# Altium PCB JH_2651M.PcbDoc (part 1 of 2)
Units mm, origin at the board's own origin, x right, y up, seen from the top; angles counter-clockwise.
Board outline 17.32 x 28.93 mm, 4 copper layers (TopLayer, MidLayer1, MidLayer2, BottomLayer); 57 components, 67 nets, 222 pads, 169 vias.
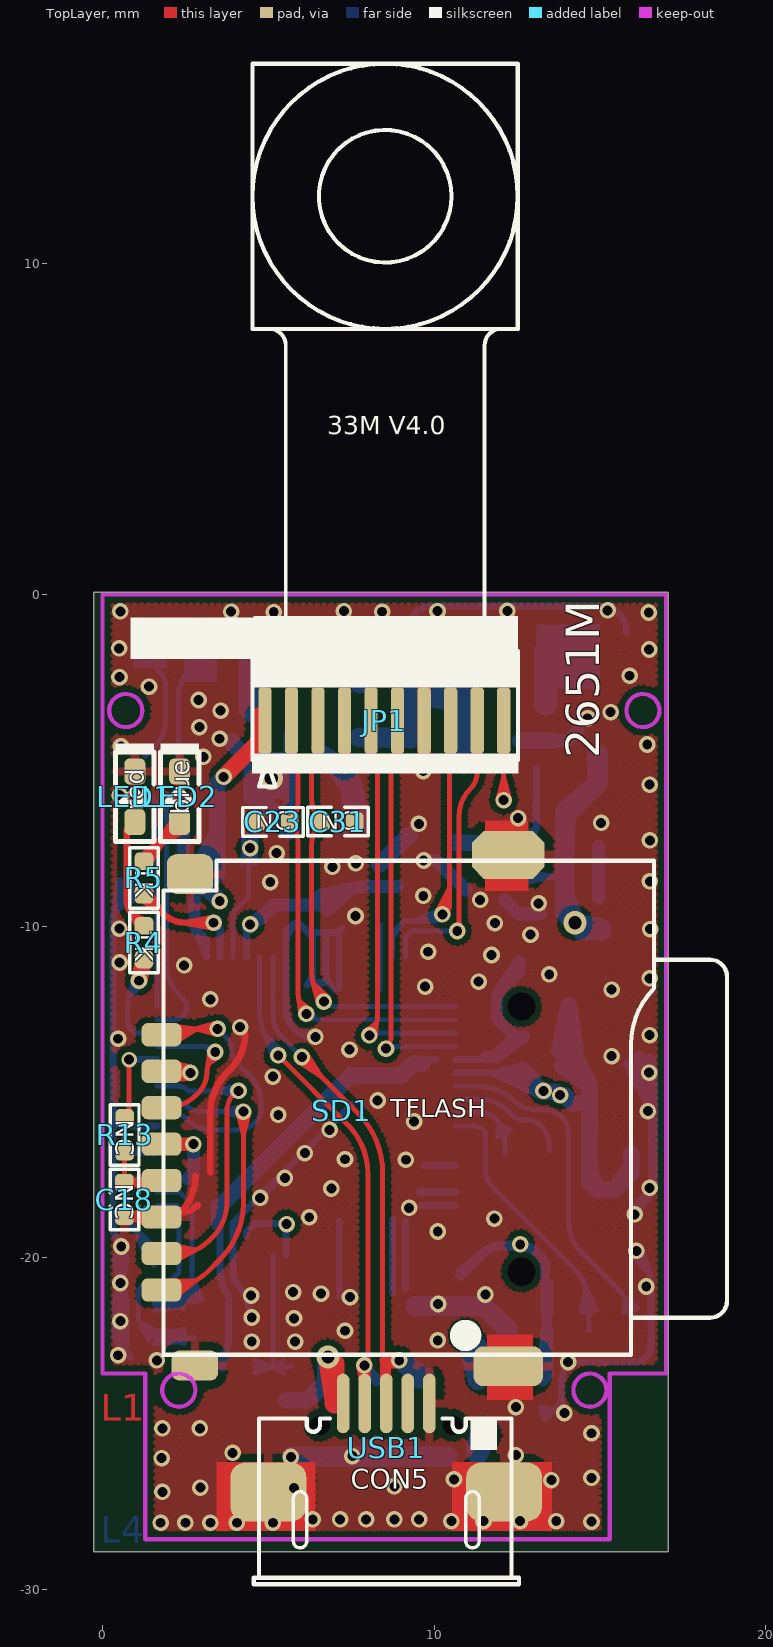
[diagram p0: TopLayer view]
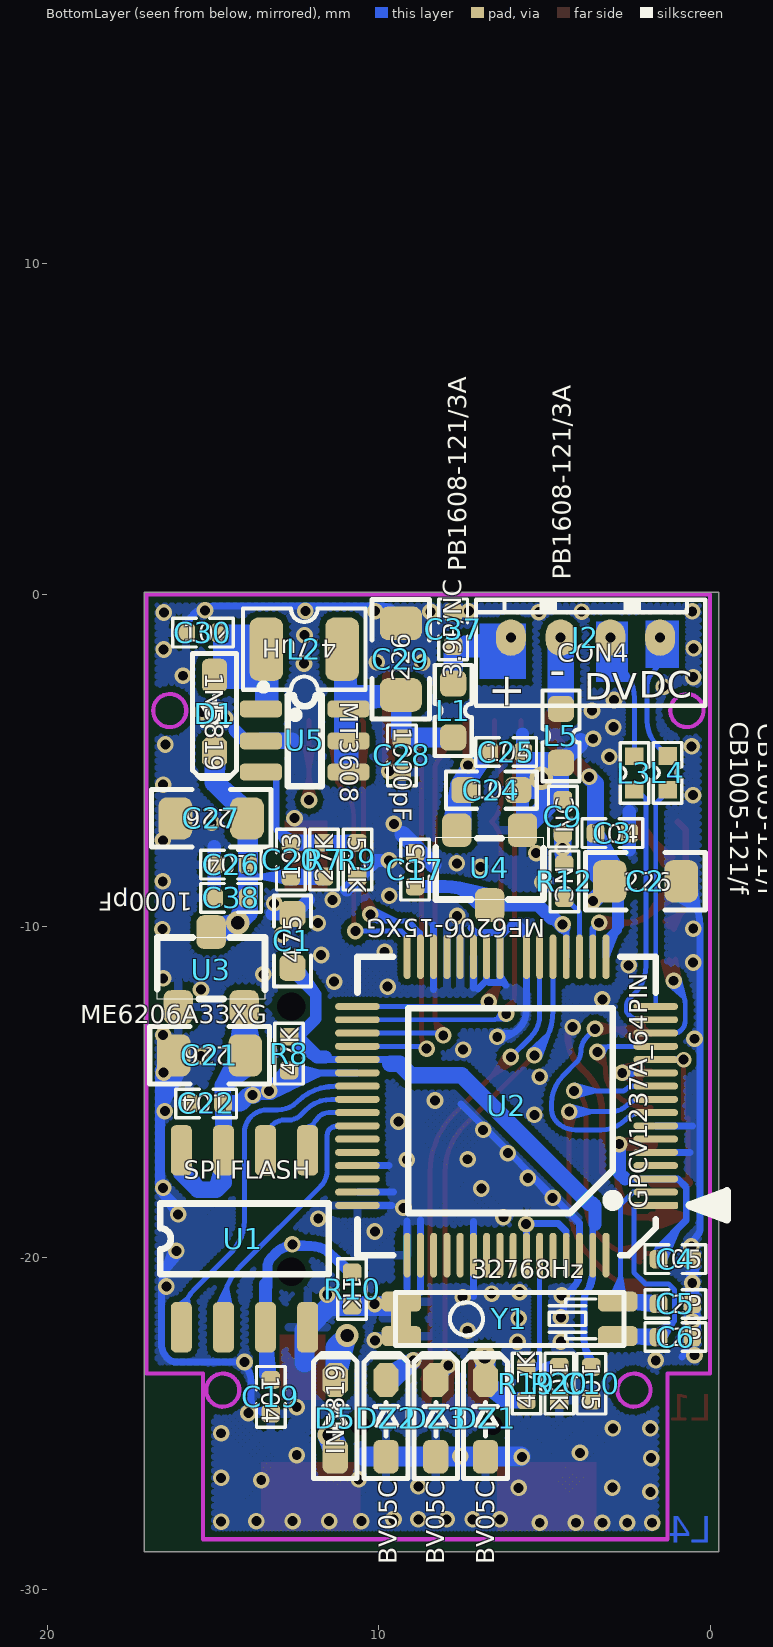
[diagram p1: BottomLayer view, seen from below]
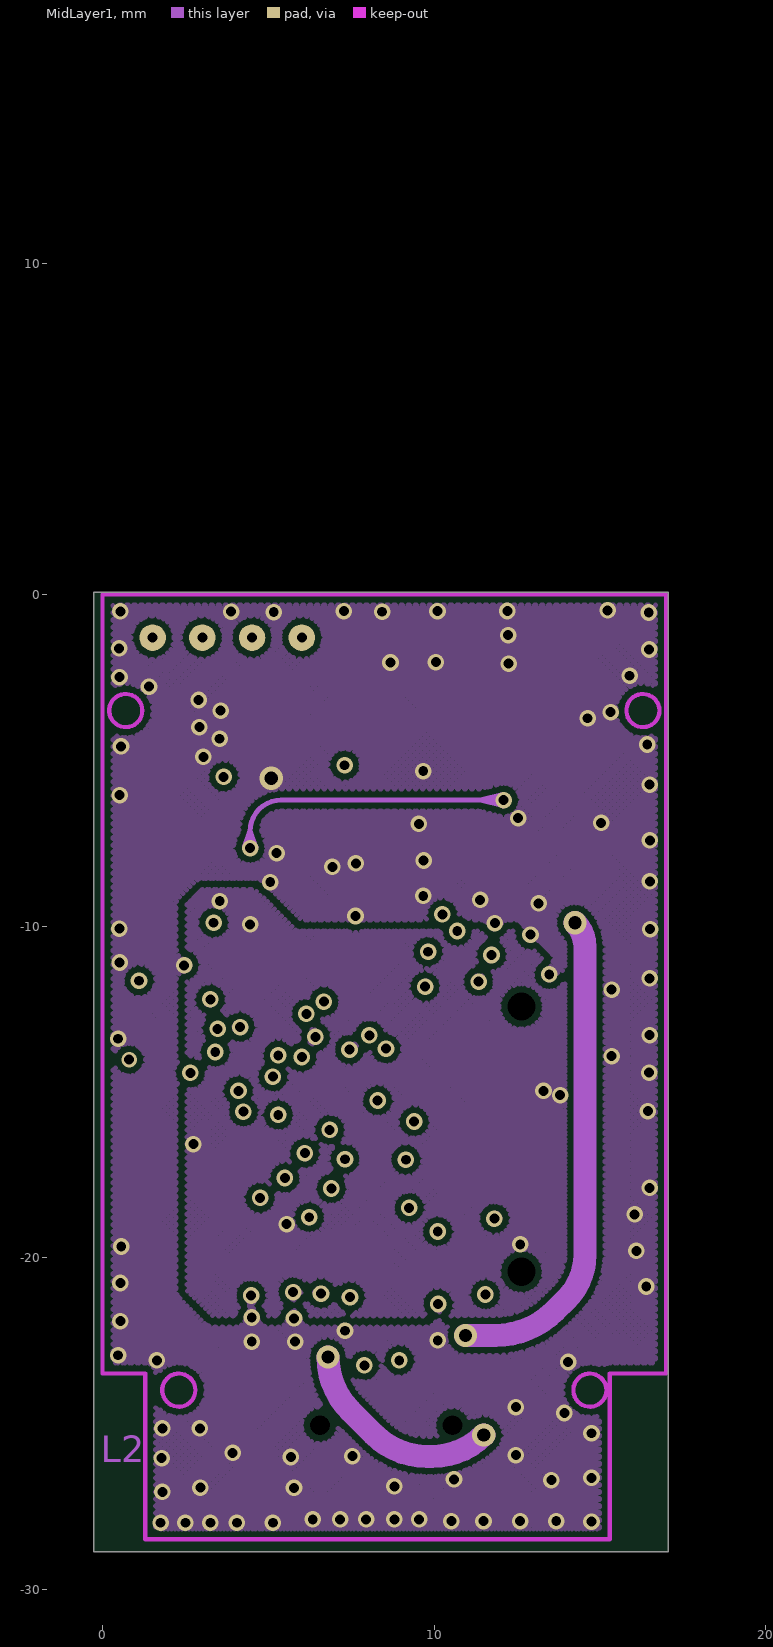
[diagram p2: MidLayer1]
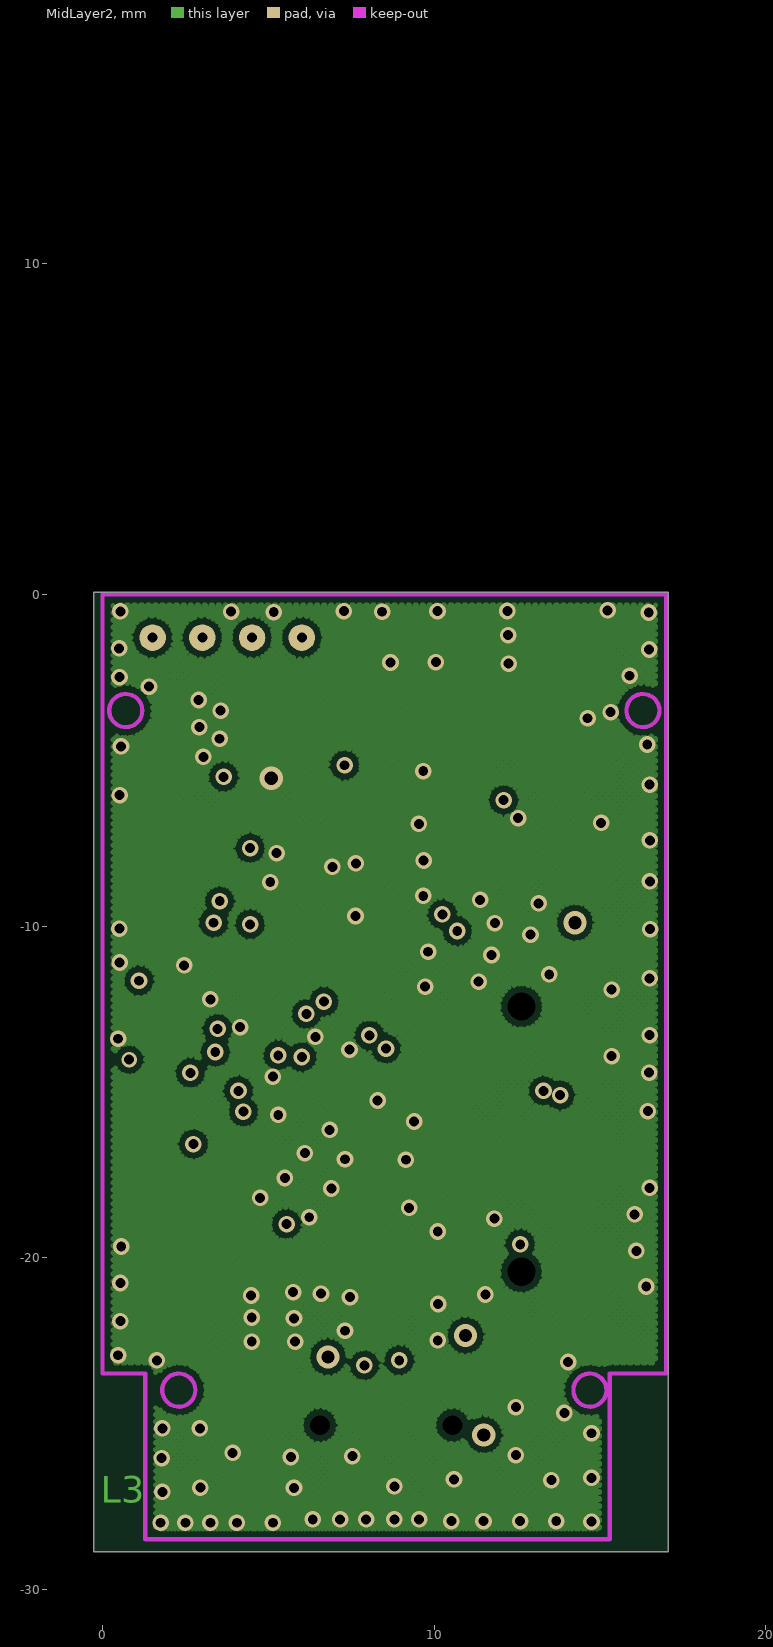
[diagram p3: MidLayer2]
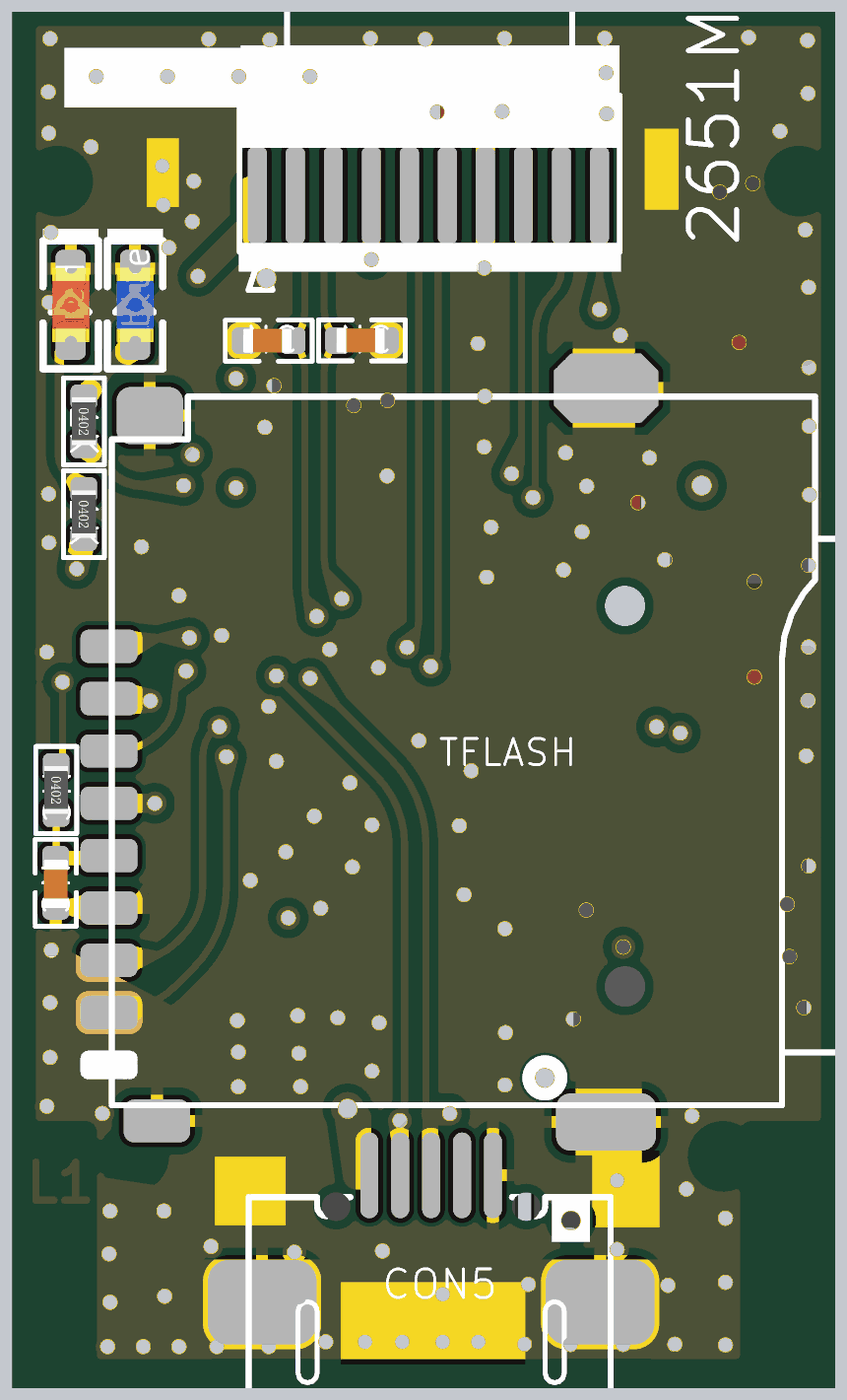
[diagram p5: 3D render of the assembled board from above, using the file's embedded part models]
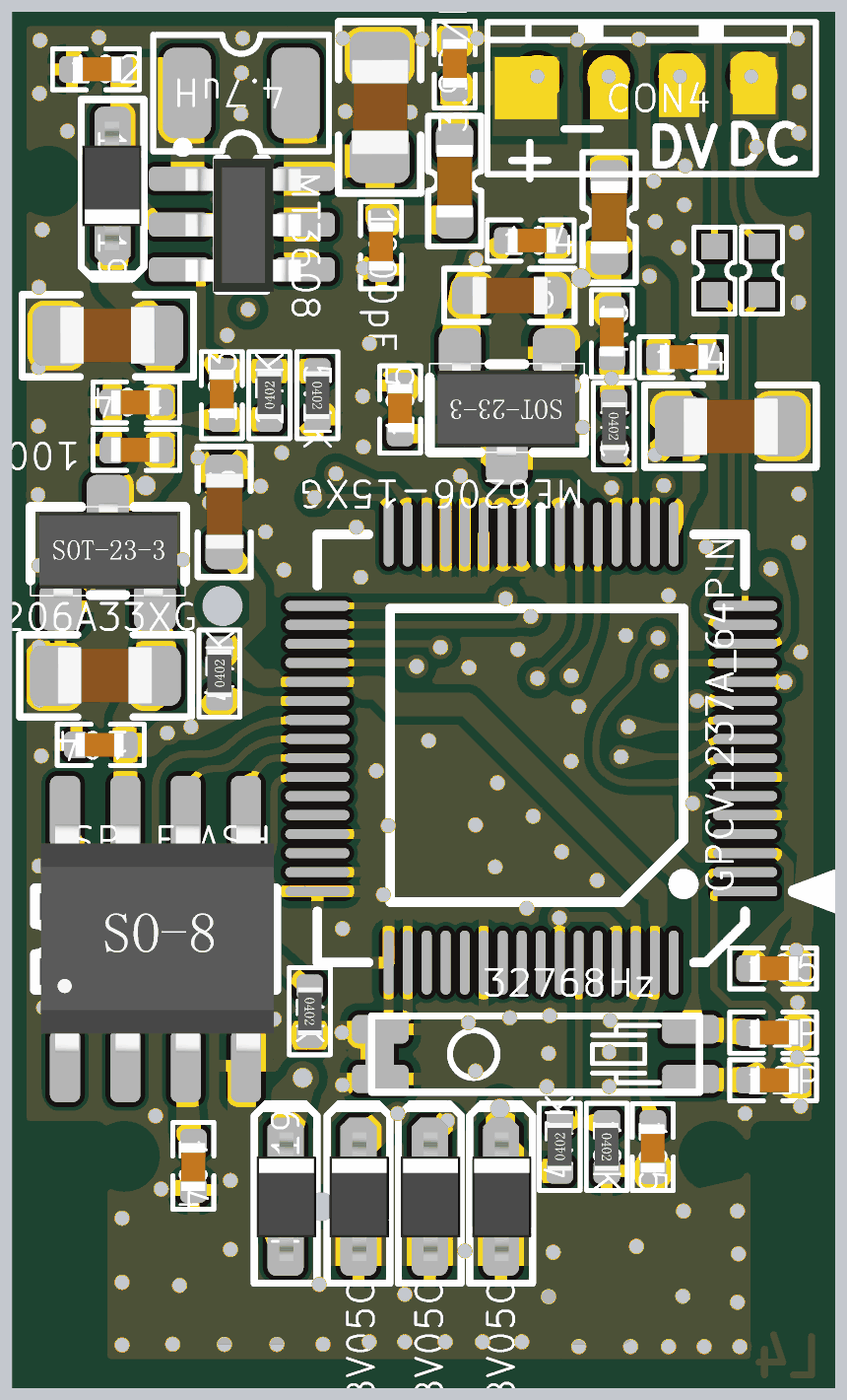
[diagram p6: 3D render of the assembled board from below, using the file's embedded part models]

## Layer stack, top to bottom
TopSolder: solder mask 0.0102, Solder Resist, Dk 3.5
TopLayer: signal copper 0.0356
Dielectric1: core 0.32, FR-4, Dk 4.8
MidLayer1: signal copper 0.0356
Dielectric2: prepreg 0.32, FR-4, Dk 4.8
MidLayer2: signal copper 0.0356
Dielectric3: core 0.32, FR-4, Dk 4.8
BottomLayer: signal copper 0.0356
BottomSolder: solder mask 0.0102, Solder Resist, Dk 3.5

## Board outline
-0.26,-28.868 17.063,-28.868 17.063,0.064 -0.26,0.064

## Design rules (kind name [scope] priority, off if disabled: settings)
Clearance Clearance_2 [InPolygon] p1: gap=0.178
Clearance [All] p2: gap=0.14
ComponentClearance [All] p1 off: gap=0.254 collisioncheckmode=3 verticalgap=0.254 showdistances=FALSE
FabricationTestPointUsage TestPointUsage [All] p1: valid=0 allowmultiple=FALSE
FabricationTestpoint Testpoint [All] p1: side=3 testpointundercomponent=TRUE minsize=1.016 maxsize=2.54 preferedsize=1.524 minholesize=0.508 maxholesize=1.016 preferedholesize=0.813 testpointgrid=0.025 allowsidetop=TRUE allowsidebottom=TRUE usegrid=TRUE gridtolerance=0
Height [All] p1 off: minheight=0 maxheight=25.4 prefheight=12.7
HoleToHoleClearance [All] p1 off: gap=0.254 allowstackedmicrovias=TRUE
MinimumSolderMaskSliver [All] p1 off: minsoldermaskwidth=0.254
NetAntennae [All] p1 off: netantennaetolerance=0
PlaneClearance [All] p1: clearance=0.203
PlaneConnect [All] p1: planeconnectstyle=Relief reliefexpansion=0.508 reliefentries=4 reliefconductorwidth=0.254 reliefairgap=0.152
PolygonConnect PolygonConnect_1 [IsVia or InComponent('C10') or InComponent('C2') or InComponent('C21') or InComponent('c27') or InComponent('C37') or InComponent('C29') or InComponent('C4') or InComponent('C5') or InComponent('C6') or InComponent('C23' ) or InComponent('C31')] p1: connectstyle=Direct reliefconductorwidth=0.254 reliefentries=4 polygonreliefangle="90 Angle" airgapwidth=0.254
PolygonConnect [All] p2: connectstyle=Relief reliefconductorwidth=0.25 reliefentries=4 polygonreliefangle="90 Angle" airgapwidth=0.254
RoomDefinition JH-2651M_V1 [InComponentClass('JH-2651M_V1')] p1 off: confinementstyle=ConfineIn formatcopy=TRUE lockcomponents=FALSE outline 15.5,-23.75 17.05,-23.75 17.05,-24.85 15.5,-24.85
RoutingLayers [All] p1: top layer_v5=TRUE mid layer 1_v5=FALSE mid layer 2_v5=FALSE bottom layer_v5=TRUE
RoutingVias [All] p1: holewidth=0.3 width=0.5 viastyle="Through Hole" minholewidth=0.3 minwidth=0.4 maxholewidth=0.3 maxwidth=0.5
SilkToSilkClearance [All] p1 off: silktosilkclearance=0.254
SilkToSolderMaskClearance SilkscreenOverComponentPads [IsPad] p1 off: minsilkscreentomaskgap=0.254 clearancetoexposedcopper=TRUE
SolderMaskExpansion [All] p1: expansion=0.102
Width Width_1 [All] p1: maxlimit=1.524 minlimit=0.14 preferedwidth=0.15
18 further rules are at their usual default settings.

## Classes and differential pairs
component class JH-2651M_V1: C1 C2 C3 C4 C5 C6 C9 C10 C17 C18 C19 C20 C21 C22 C24 C25 C26 C27 C28 C29 C30 C37 C38 D1 D5 DZ1 DZ2 DZ3 J2 JP1 L1 L2 LED1 LED2 R4 R5 R7 R8 R9 R10 R12 R19 R20 SD1 U1 U2 U3 U4 U5 USB1 Y1

## Components (designator, comment, footprint, x,y, rotation, side; value= is the part's Value field where it differs from the comment)
C1 "475" C0603 12.6,-10.45 r90 bottom
C2 "226" C0805 1.95,-8.65 r180 bottom
C3 "104" C0402 2.95,-7.2 r180 bottom
C4 "105" C0402 1.05,-20.05 r180 bottom
C5 "12P" C0402 1.05,-21.4 r180 bottom
C6 "12P" C0402 1.05,-22.4 r180 bottom
C9 "NC" C0402 4.442,-6.7 r90 bottom
C10 "105" C0402 3.583,-23.807 r270 bottom
C17 "105" C0402 8.9,-8.3 r90 bottom
C18 "NC" C0402 0.659,-18.25 r270 top
C19 "104" C0402 13.25,-24.2 r270 bottom
C20 "103" C0402 12.65,-8 r90 bottom
C21 "226" C0805 15.1,-13.9 r0 bottom
C22 "104" C0402 15.2,-15.35 r0 bottom
C23 "NC" C0402 5.14,-6.854 r180 top (schematic designator C18)
C24 "106" C0603 6.6,-5.9 r180 bottom
C25 "104" C0402 6.15,-4.75 r180 bottom
C26 "104" C0402 14.45,-8.15 r0 bottom
C27 "226" C0805 15.05,-6.75 r0 bottom
C28 "1000pF" C0402 9.3,-4.85 r270 bottom
C29 "226" C0805 9.33,-1.95 r90 bottom
C30 "102" C0402 15.3,-1.15 r180 bottom
C31 "NC" C0402 7.1,-6.85 r180 top (schematic designator C18)
C37 "3.9P/NC" C0402 7.75,-1.05 r90 bottom
C38 "1000pF" C0402 14.45,-9.15 r0 bottom
D1 "1N5819" SOD-323 14.95,-3.6 r270 bottom
D5 "IN5819" SOD-323 11.308,-24.85 r90 bottom
DZ1 "BV05C" ESD-SOD323 6.8,-24.65 r90 bottom
DZ2 "BV05C" ESD-SOD323 9.8,-24.65 r90 bottom
DZ3 "BV05C" ESD-SOD323 8.3,-24.65 r90 bottom
J2 "CON4" SIP4/1.27 1.7,-1.3 r0 bottom
JP1 "33M V4.0" 10pin-mipi/0.7 8.5,-3.8 r0 top
L1 "PB1608-121/3A" L0603 7.75,-3.5 r270 bottom
L2 "4.7uH" L2520 11.1,-1.65 r0 bottom
L3 "CB1005-121/f" L0402 2.284,-5.383 r270 bottom (schematic designator L1)
L4 "CB1005-121/f" L0402 1.285,-5.377 r270 bottom (schematic designator L1)
L5 "PB1608-121/3A" L0603 4.5,-4.263 r270 bottom (schematic designator L1)
LED1 "red" LED0603R 0.973,-6.1 r90 top
LED2 "blue" LED0603B 2.327,-6.1 r90 top
R4 "1K" R0402 1.25,-10.5 r270 top
R5 "1K" R0402 1.25,-8.55 r270 top
R7 "27K" R0402 11.65,-8 r90 bottom
R8 "47K" R0402 12.7,-13.85 r90 bottom
R9 "5.1K" R0402 10.64,-8 r270 bottom
R10 "1K" R0402 10.8,-20.95 r270 bottom
R12 "NC" R0402 4.4,-8.65 r270 bottom
R13 "NC" R0402 0.669,-16.3 r270 top (schematic designator R12)
R19 "4.7K" R0402 5.54,-23.8 r90 bottom
R20 "10K" R0402 4.55,-23.8 r270 bottom
SD1 "TFLASH" TFC-0002 12.637,-20.429 r90 top
U1 "SPI FLASH" SOP8 15.95,-22.1 r90 bottom
U2 "GPCV1237A_64PIN" LQFP64-0.4 1.64,-18.427 r0 bottom
U3 "ME6206A33XG" SOT23 15.05,-11.3 r180 bottom
U4 "ME6206-15XG" SOT23 6.65,-8.25 r0 bottom
U5 "MT3608" SOT23-6 13.55,-3.45 r180 bottom
USB1 "CON5" USB/MIN5PIN-SMT 7.258,-24.4 r180 top
Y1 "32768Hz" XTAL-1.5X7 6.05,-21.85 r0 bottom

## Footprints (in the part's own frame and the unit in brackets; to place one, negate y for a bottom-side part, rotate by r counter-clockwise, add the part's x,y. Pads: shape width x height; smd on the part's side, far side on the other; paste and mask are expansions set on the pad)
10pin-mipi/0.7 [mm]
  rrect50% 0.4x2 smd: 1(-3.6,0) 2(-2.8,0) 3(-2,0) 4(-1.2,0) 5(-0.4,0) 6(0.4,0) 7(1.2,0) 8(2,0) 9(2.8,0) 10(3.6,0)
  silkscreen extent -3.97,-1.99 4.03,19.81
C0402 [mil] "0402"
  rrect50% 21x22 smd: 1(-20,0) 2(20,0)
  silkscreen extent -36,-17 36,17, body extent -19,-10 21,10, height 10
C0603 [mil] "0603"
  rrect50% 31x31 smd: 1(-32,0) 2(32,0)
  silkscreen extent -54,-22 54,22, body extent -31,-16 32,15, height 24
C0805 [mil] "0805"
  rrect50% 40x50 smd: 1(-42.5,0) 2(42.5,0)
  silkscreen extent -71,-34 71,34, body extent -39,-24 40,23, height 47
ESD-SOD323 [mil] "ESD管"
  oct 40x30 smd: 1(37.63,-0.98)
  rrect50% 40x30 smd: 2(-53.37,-0.98)
  silkscreen extent -79,-27 69,25, body extent -61,-26 45,23, height 32
L0402 [mil] "0402"
  rect 21x22 smd: 1(-20,0) 2(20,0)
  silkscreen extent -36,-17 36,17
L0603 [mil] "600 0HM/600MA"
  rrect50% 31x31 smd: 1(-32,0) 2(32,0)
  silkscreen extent -54,-22 54,22, body extent -30,-15 30,15, height 30
L2520 [mil]
  rrect50% 40x75 smd: 1(0,0) 2(90,0)
  silkscreen extent -28,-48 118,48
LED0603B [mil] "06"
  rrect50% 31x25 smd: 1(-30,0) 2(30,0)
  silkscreen extent -53,-23 63,23, body extent -31,-16 31,15, height 20
LED0603R [mil] "06"
  rrect50% 31x25 smd: 1(-30,0) 2(30,0)
  silkscreen extent -53,-23 63,23, body extent -31,-16 31,15, height 20
LQFP64-0.4 [mm] "IC"
  rrect50% 1.35x0.21 smd: 1(0,0)
  oval 1.35x0.21 smd: 2(0,-0.4) 3(0,-0.8) 4(0,-1.2) 5(0,-1.6) 6(0,-2) 7(0,-2.4) 8(0,-2.8) 9(0,-3.2) 10(0,-3.6) 11(0,-4) 12(0,-4.4) 13(0,-4.8) 14(0,-5.2) 15(0,-5.6) 16(0,-6) 33(9,-6) 34(9,-5.6) 35(9,-5.2) 36(9,-4.8) 37(9,-4.4) 38(9,-4) 39(9,-3.6) 40(9,-3.2) 41(9,-2.8) 42(9,-2.4) 43(9,-2) 44(9,-1.6) 45(9,-1.2) 46(9,-0.8) 47(9,-0.4) 48(9,0)
  oval 0.21x1.35 smd: 17(1.5,-7.5) 18(1.9,-7.5) 19(2.3,-7.5) 20(2.7,-7.5) 21(3.1,-7.5) 22(3.5,-7.5) 23(3.9,-7.5) 25(4.7,-7.5) 26(5.1,-7.5) 27(5.5,-7.5) 28(5.9,-7.5) 29(6.3,-7.5) 30(6.7,-7.5) 31(7.1,-7.5) 32(7.5,-7.5) 49(7.5,1.5) 50(7.1,1.5) 51(6.7,1.5) 52(6.3,1.5) 53(5.9,1.5) 54(5.5,1.5) 55(5.1,1.5) 56(4.7,1.5) 57(4.3,1.5) 58(3.9,1.5) 59(3.5,1.5) 60(3.1,1.5) 61(2.7,1.5) 62(2.3,1.5) 63(1.9,1.5) 64(1.5,1.5)
  oval 0.21x1.35 on Bottom Overlay: 24(4.3,-7.5)
  silkscreen extent -2.15,-7.5 9,1.5
R0402 [mil] "0402"
  rrect50% 21x22 smd: 1(-20,0) 2(20,0)
  silkscreen extent -36,-17 36,17, body extent -20,-10 20,10, height 14
SIP4/1.27 [mm] "连?"
  oval 0.9x1.1 / inner round 0.8 / far side round 0.8 hole 0.3: 1(4.31,0) 2(2.81,0) 3(1.31,0) 4(-0.19,0)
  silkscreen extent -1.55,-1.14 5.36,2.06
SOD-323 [mil] "贴?"
  rrect50% 40x30 smd: 1(-45.5,0)
  oct 40x30 smd: 2(45.5,0)
  silkscreen extent -72,-26 77,26, body extent -53,-25 53,24, height 32
SOP8 [mil] "IC"
  rrect50% 60x25 smd: 1(0,0) 2(0,-50) 3(0,-100) 4(0,-150) 5(210,-150) 6(210,-100) 7(210,-50) 8(210,0)
  round 30 on Bottom Overlay: ""(82,3)
  silkscreen extent 63,-175 147,25, body extent -13,-173 224,20
SOT23 [mil] "SOT23"
  rrect50% 35x40 smd: 1(-39,-45) 2(39,-45) 3(0,44)
  silkscreen extent -64,-36 64,38, body extent -57,-54 57,57
SOT23-6 [mil] "SOT23-6"
  rrect50% 50x20 smd: 1(0,0) 2(0,-38) 3(0,-75) 4(104,-75) 5(104,-38) 6(104,0)
  silkscreen extent 0,-92 72,29, body extent 5,-93 101,17, height 43
TFC-0002 [mm]
  round 0.8 hole 0.85 unplated: 0(0,0) 0(8,0)
  rrect50% 0.7x1.2 smd: 1(7.15,10.858) 2(6.05,10.858) 3(4.95,10.858) 4(3.85,10.858) 5(2.75,10.858) 6(1.65,10.858) 7(0.55,10.858) 8(-0.55,10.858)
  rrect50% 0.6x1.2 on Top Overlay: 9(-1.65,10.858)
  rrect50% 1.2x2.1 smd: 10(-2.85,0.399)
  rrect50% 0.9x1.4 smd: 10(-2.827,9.851)
  rrect50% 1.2x1.4 smd: 10(12,10)
  oct 1.454x2.2 smd: 10(12.577,0.399)
  silkscreen extent -2.5,-6.2 12.4,10.8
USB/MIN5PIN-SMT [mm] "迈克"
  oval 0.381x1.8 smd: 1(0,0) 2(-0.65,0) 3(-1.3,0) 4(-1.95,0) 5(-2.6,0)
  rrect50% 2.286x1.778 smd: 5(-4.856,2.667) 5(2.256,2.667)
  round 0.5 hole 0.6 unplated: ""(-3.3,0.658) ""(0.7,0.658)
  silkscreen extent -5.3,0.46 2.7,5.46
XTAL-1.5X7 [mm]
  rrect50% 1.2x0.6 smd: 1(-3.264,-0.521) 2(-3.264,0.521) 3(3.264,-0.521) 4(3.264,0.521)
  rect 0.6x1 smd: 3(3.28,-0.015)
  silkscreen extent -3.45,-0.8 3.45,0.8

## Part data
C1 C2 C3 C4 C5 C6 C9 C10 C17 C18 C19 C20 C23 C26 C27 C28 C29 C30 C31 C37: library part CAP, "Capacitor"
C21 C22 C24 C25 C38: library part CAP, "贴?"
D1 D5: library part "DIODE SCHOTTKY", "Diode(Schottky)"
DZ1 DZ2 DZ3: library part ESD, "ESD"
J2 USB1: "Connector"
JP1: library part CON10, "Connector"
L1 L3 L4 L5: library part L-1, "电感"
L2: library part L-1, "电?"
LED1: library part LED-R, "LED/红色"
LED2: library part LED-B, "LED/蓝色"
R4 R5 R7 R8 R9 R10 R12 R13 R19 R20: library part RES, "Resistor"
SD1: library part SD-MICRO, "外卡"
U1: library part AT25010A
U2: library part GPCV12417A_64PIN
U3 U4: library part IC3, "IC(Cmanostat)"
U5: library part Component_1
Y1: library part CRYSTAL, "Crystal"

## Via types
v1: diameter 0.5, hole 0.3, TopLayer to BottomLayer, tented both sides, 163 vias
v2: diameter 0.7, hole 0.4, TopLayer to BottomLayer, tented both sides, 5 vias
v3: diameter 0.47, hole 0.3, TopLayer to BottomLayer, tented both sides, 1 vias

## Nets (pads, with @x,y where several pads share a name; then routed paths per layer and width w, separated by ;. In a path a pad name is that pad's centre, name@x,y a point inside that pad or via, vN(x,y) a via of type N, cw(c..) or ccw(c..) an arc to the next point about the centre after c; other vN are vias at no path point)
3.8V: C20.1 C26.1 C27.1 C38.1 D1.2 D5.2 R7.1 U3.3 | length 62.6
  MidLayer1 w0.7: v2(10.95,-22.35) 11.848,-22.35 ccw(c11.848,-19.81) 13.644,-21.606 14,-21.25 ccw(c12.672,-19.922) 14.55,-19.922 14.55,-10.624 ccw(c13.526,-10.624) v2(14.25,-9.9)
  BottomLayer w0.2: R7.1@11.65,-8.508 C20.1@12.65,-8.508 13.8,-8.508 ; R7.1@11.663,-8.508 C20.1@12.529,-8.508 ; R7.1@11.679,-8.674 C20.1@12.529,-8.508 ; R7.1@11.679,-8.342 C20.1@12.529,-8.508 ; C20.1@12.594,-8.669 R7.1@11.778,-8.361 ; C20.1@12.594,-8.347 R7.1@11.778,-8.655 ; C20.1@12.649,-8.674 R7.1@11.778,-8.655 ; C20.1@12.649,-8.342 R7.1@11.778,-8.361 ; C20.1@12.663,-8.508 13.529,-8.508 ; C20.1@12.679,-8.674 13.529,-8.508 ; C20.1@12.679,-8.342 13.529,-8.508 ; R7.1@11.771,-8.508 12.621,-8.674 R7.1@11.771,-8.508 ; R7.1@11.771,-8.508 12.621,-8.342 R7.1@11.771,-8.508 ; R7.1@11.771,-8.508 C20.1@12.637,-8.508 ; R7.1@11.771,-8.508 C20.1@12.637,-8.508 ; R7.1@11.778,-8.655 C20.1@12.637,-8.508 ; R7.1@11.778,-8.361 C20.1@12.637,-8.508
  BottomLayer w0.6: C27.1@13.971,-6.523 14.95,-5.67 ; D1.2@14.9,-4.883 14.95,-5.67 ; D1.2@14.95,-4.806 14.95,-5.67 ; U3.3@15.05,-10.069 v2(14.25,-9.9) ; v2(10.95,-22.35) 11.308,-22.708 ; v2(10.95,-22.35) 11.308,-22.708 ; v2(10.95,-22.35) 11.308,-23.567 11.308,-22.708 ; v2(10.95,-22.35) 11.308,-22.708 ; v2(10.95,-22.35) D5.2@11.308,-23.694 11.308,-22.708 ; 13.942,-9.592 v2(14.25,-9.9) ; 13.942,-9.592 C38.1@13.942,-9.113 ; 13.942,-9.592 C38.1@13.942,-9.113 ; 13.942,-9.592 C38.1@13.942,-9.15 C38.1@13.942,-9.1 ; C38.1@13.942,-9.113 v2(14.25,-9.9) ; C38.1@13.942,-9.113 v2(14.25,-9.9) ; C38.1@13.942,-9.113 v2(14.25,-9.9) ; C38.1@13.942,-9.113 v2(14.25,-9.9) ; C38.1@13.942,-9.1 13.942,-8.113 13.942,-9.087 C26.1@13.942,-8.1 ; C38.1@13.942,-9.1 v2(14.25,-9.9) ; C38.1@13.942,-9.1 C26.1@13.942,-8.15 C26.1@13.942,-8.1 ; C26.1@13.942,-8.1 13.971,-6.777 13.942,-8.087 C27.1@13.942,-6.679 ; C26.1@13.942,-8.1 C27.1@13.942,-6.679 ; C27.1@13.942,-6.679 14.95,-5.67 ; v2(14.25,-9.9) v2@14.482,-10.132 ; v2(14.25,-9.9) U3.3@15.05,-10.132 ; v2(14.25,-9.9) U3.3@15.05,-10.132 ; v2@14.482,-10.132 U3.3@15.05,-10.132 ; v2@14.482,-10.132 U3.3@15.05,-10.132
AGND: 
CSI_MCLK: 
CSI_SCK: JP1.8 U2.31 | length 16.1
  TopLayer w0.15: v1@10.087,-9.586 10.46,-8.879 ; JP1.8@10.375,-4.604 10.46,-5.251 ; v1@10.423,-9.677 10.46,-8.879 ; JP1.8@10.5,-4.6 10.46,-5.251 ; JP1.8@10.5,-3.8 10.46,-3.84 10.46,-9.44 v1(10.25,-9.65) 10.46,-8.879 ; JP1.8@10.623,-4.62 10.46,-5.251
  BottomLayer w0.15: U2.31@8.74,-10.927 8.74,-10.2 ; 9.027,-9.913 U2.31@8.74,-10.357 ; v1@10.191,-9.485 9.435,-9.85 ; v1@10.274,-9.823 9.435,-9.85 ; U2.31@8.74,-10.357 8.74,-10.2 ; U2.31@8.74,-10.357 8.74,-10.2 ; 8.74,-10.2 9.09,-9.85 10.05,-9.85 v1(10.25,-9.65) 9.435,-9.85
CSI_SDA: JP1.9 U2.32 | length 10
  TopLayer w0.15: v1(10.7,-10.15) 10.75,-10.1 10.75,-6.695 cw(c11.945,-6.695) 11.1,-5.85 ccw(c10.617,-5.367) 11.3,-5.367 JP1.9@11.3,-4.75 ; JP1.9@11.176,-4.612 11.3,-5.25 ; JP1.9@11.3,-4.6 11.3,-5.25 ; JP1.9@11.424,-4.612 11.3,-5.25
  BottomLayer w0.15: U2.32@9.14,-10.927 9.14,-10.322 9.312,-10.15 ; U2.32@9.14,-10.357 9.312,-10.15 ; v1(10.7,-10.15) 9.312,-10.15
D+: DZ2.1 U2.22 USB1.3 | length 24.3
  TopLayer w0.15: v1@5.9,-14.086 6.578,-14.518 v1@6.146,-13.84 ; v1(6.01,-13.95) 7.706,-15.646 cw(c5.91,-17.442) 8.45,-17.442 8.45,-24.14 ccw(c8.818,-24.14) USB1.3@8.558,-24.4 ; USB1.3@8.443,-23.699 8.45,-23.043 ; USB1.3@8.558,-23.691 8.45,-23.043 ; USB1.3@8.67,-23.662 8.45,-23.043
  TopLayer w0.3: USB1.3@8.558,-24.4 8.558,-23.058 ; USB1.3@8.558,-23.691 8.558,-23.058 ; 8.558,-23.058 v1(8.95,-23.1) 8.558,-23.058
  TopLayer w0.5: 8.6,-23.1 v1(8.95,-23.1) 8.6,-23.1
  BottomLayer w0.15: 5.14,-12.052 U2.22@5.14,-11.497 ; U2.22@5.14,-10.927 5.14,-12.684 ccw(c6.096,-12.684) 5.42,-13.36 v1(6.01,-13.95)
  BottomLayer w0.5: DZ2.1@9.775,-23.694 9.544,-23.694 v1(8.95,-23.1) DZ2.1@9.775,-23.567
D-: DZ3.1 U2.21 USB1.2 | length 19.6
  TopLayer w0.15: v1(5.3,-13.9) 7.4,-16 cw(c5.951,-17.449) 8,-17.449 8,-24.177 cw(c7.685,-24.177) USB1.2@7.908,-24.4 ; v1@7.725,-23.243 USB1.2@7.795,-23.664
  TopLayer w0.35: USB1.2@7.908,-24.4 v1@7.908,-23.258
  BottomLayer w0.15: 4.74,-12.052 U2.21@4.74,-11.497 ; U2.21@4.74,-10.927 4.74,-12.548 ccw(c6.652,-12.548) v1(5.3,-13.9) 4.889,-13.274 ; v1@5.143,-13.978 4.889,-13.274 ; v1@5.434,-13.788 4.889,-13.274
  BottomLayer w0.35: v1(7.9,-23.25) 7.9,-23.319 DZ3.1@8.275,-23.694
DC: J2.4 L4.1 | length 3.9
  BottomLayer w0.15: L4.1@1.285,-4.869 1.585,-4.568 ccw(c0.826,-3.809) 1.9,-3.809 1.9,-2.74 ccw(c1.388,-2.74) 1.75,-2.378 cw(c2.329,-1.798) 1.51,-1.798 J2.4@1.51,-1.3
DV: J2.3 L3.1 | length 3.8
  BottomLayer w0.15: L3.1@2.284,-4.875 2.284,-3.129 cw(c3.533,-3.129) 2.65,-2.245 ccw(c1.781,-1.376) 3.01,-1.376 J2.3@3.01,-1.3
GND: C1.2 C2.2 C3.2 C4.2 C5.2 C6.2 C9.2 C10.2 C17.2 C18.2 C19.2 C21.2 C22.2 C23.2 C24.2 C25.2 C26.2 C27.2 C28.2 C29.2 C30.1 C31.1 C37.2 C38.2 DZ1.2 DZ2.2 DZ3.2 JP1.7 L5.2 LED1.2 LED2.2 R9.2 R10.2 R20.2 SD1.6 SD1.10 U1.4 U2.5 U2.7 U2.23 U2.25 U2.26 U2.27 U2.28 U2.29 U2.30 U2.45 U2.47 U2.48 U2.49 U2.50 U2.54 U2.62 U3.1 U4.1 U5.2 USB1.5 Y1.3 Y1.4 | length 153.8
  TopLayer w0.2: SD1.6@1.779,-18.779 SD1.6@2.233,-18.779 ; SD1.6@2.311,-18.65 ccw(c2.311,-17.868) SD1.6@2.34,-18.649 ; 2.803,-17.531 cw(c1.22,-17.531) SD1.6@2.34,-18.649 ; 2.865,-18.421 cw(c2.311,-17.868) SD1.6@2.34,-18.649 ; 3.25,-17.431 3.25,-15.635 cw(c4.957,-15.635) 3.75,-14.427 3.864,-14.314 ccw(c2.81,-13.26) 4.3,-13.26 4.137,-13.097 4.137,-13.063 v1(4.15,-13.05)
  TopLayer w0.3: C18.2@0.9,-18.758 1.758,-18.758 C18.2@0.913,-18.758 ; C18.2@0.9,-18.758 1.491,-18.975 C18.2@0.913,-18.758 ; C18.2@0.9,-18.758 1.504,-18.581 C18.2@0.913,-18.758 ; C18.2@0.9,-18.758 1.529,-18.779 C18.2@0.913,-18.758
  TopLayer w0.4: v1@9.7,-5.134 JP1.7@9.7,-3.8 9.7,-2.478
  BottomLayer w0.21: C6.2@0.381,-22.399 C5.2@0.394,-21.497 ; C5.2@0.381,-21.428 C6.2@0.542,-22.256 ; C5.2@0.381,-21.373 0.542,-20.491 ; C4.2@0.381,-20.077 v1@0.542,-20.959 ; C6.2@0.385,-22.347 C5.2@0.69,-21.497 ; C4.2@0.385,-19.999 v1@0.542,-19.693 ; C6.2@0.406,-22.5 0.683,-22.782 ; C2.2@0.494,-8.633 0.374,-9.511 ; 0.526,-16.027 U2.7@1.64,-16.027 ; C6.2@0.542,-22.413 0.683,-22.782 ; C5.2@0.542,-21.413 C6.2@0.542,-22.256 ; C5.2@0.542,-21.387 0.542,-20.491 ; C4.2@0.542,-20.063 v1@0.542,-20.959 ; C4.2@0.542,-20.037 v1@0.542,-19.693 ; 0.6,-16.827 U2.5@1.64,-16.827 ; C6.2@0.699,-22.347 C5.2@0.394,-21.497 ; C4.2@0.699,-19.999 v1@0.542,-19.693 ; C2.2@0.7,-8.687 0.374,-9.511 ; C6.2@0.702,-22.387 0.683,-22.782 ; C5.2@0.703,-21.428 C6.2@0.542,-22.256 ; C5.2@0.703,-21.373 0.542,-20.491 ; C4.2@0.703,-20.077 v1@0.542,-20.959 ; C6.2@0.703,-22.399 C5.2@0.69,-21.497 ; 0.85,-23 cw(c1.594,-22.256) C6.2@0.542,-22.256 ; C2.2@0.871,-8.777 0.374,-9.511 ; C2.2@0.871,-8.65 ccw(c2.228,-10.008) 0.308,-10.008 0.308,-19.128 ccw(c0.622,-19.128) 0.4,-19.35 cw(c0.057,-19.693) v1@0.542,-19.693 ; C2.2@1.018,-8.902 0.374,-9.511 ; C2.2@1.144,-9.073 0.374,-9.511 ; U2.62@3.94,-20.497 4.013,-20.75 ; U2.62@3.94,-19.357 3.94,-18.952 ; v1@4.431,-21.8 4.431,-21.664 ccw(c3.3,-21.664) 4.1,-20.863 cw(c4.486,-20.477) 3.94,-20.477 U2.62@3.94,-19.927 3.94,-18.952 ; v1@5.491,-17.401 v1@4.85,-18.15 ; 5.54,-12.232 U2.23@5.54,-11.497 ; 5.955,-9.945 6.204,-10.194 ; v1@6.399,-13.486 5.959,-13.241 ; v1@6.403,-13.36 cw(c6.403,-12.472) 5.775,-13.1 cw(c6.342,-12.533) 5.54,-12.533 U2.23@5.54,-10.927 5.54,-10.16 ; v1@6.45,-13.35 5.959,-13.241 ; v1@6.461,-13.205 5.959,-13.241 ; 7,-11.9 6.74,-11.64 ; 7.14,-21.171 U2.54@7.14,-19.927 7.14,-18.917 ; U2.27@7.14,-11.497 7.14,-11.874 U2.27@7.14,-10.927 7.14,-10.15 U2.27@7.14,-10.357 ; 7.218,-10.06 7.084,-10.194 6.634,-10.194 ; 7.521,-15.371 3.94,-18.952 ; 8.34,-11.919 U2.30@8.34,-10.927 8.34,-9.973 ; U2.50@8.74,-20.497 8.74,-21.05 U2.50@8.74,-19.927 8.74,-18.86 U2.50@8.74,-19.357 ; U2.49@9.14,-20.497 9.14,-20.94 U2.49@9.14,-19.927 9.14,-18.9 U2.49@9.14,-19.357 ; C29.2@9.33,-0.871 cw(c9.851,-0.871) 9.851,-0.35 15.008,-0.35 cw(c15.008,-1.15) C30.1@15.808,-1.15 ; U2.48@10.07,-18.427 9.6,-18.427 U2.48@10.64,-18.427 ; U2.47@10.07,-18.027 9.55,-18.027 U2.47@10.64,-18.027 ; U2.45@10.07,-17.227 9.69,-17.227 U2.45@10.64,-17.227 ; C19.2@13.25,-24.708 ccw(c13.25,-24.003) 13.748,-24.502 ccw(c13.503,-24.256) 13.85,-24.256 13.85,-23.712 cw(c14.432,-23.712) 14.02,-23.3 cw(c14.383,-23.662) 14.383,-23.15 16.113,-23.15 ccw(c16.113,-22.815) 16.35,-23.052 16.372,-23.03 ccw(c15.942,-22.6) 16.55,-22.6 16.55,-20.886 ccw(c15.014,-20.886) v1(16.1,-19.8) ; C19.2@13.256,-24.546 13.602,-24.614 ; C19.2@13.263,-24.708 13.602,-24.614 ; C19.2@13.341,-24.85 13.602,-24.614 ; v1@15.982,-19.884 16.498,-20.489 v1@16.232,-19.739 ; C5.2@0.394,-21.497 C6.2@0.542,-22.387 ; C6.2@0.542,-22.387 C5.2@0.542,-21.491 ; C6.2@0.542,-22.387 C5.2@0.69,-21.497 ; C6.2@0.542,-22.387 C5.2@0.542,-21.491 ; C6.2@0.542,-22.256 C5.2@0.542,-21.4 C4.2@0.542,-20.05 v1@0.542,-19.693 ; C5.2@0.542,-21.491 0.381,-22.373 C5.2@0.542,-21.491 ; C5.2@0.542,-21.491 0.703,-22.373 C5.2@0.542,-21.491 ; v1@4.581,-18.311 v1@4.894,-18.288 ; v1@4.581,-18.311 v1@4.749,-18.046 ; v1@4.581,-18.311 v1@4.85,-18.15 ; v1@4.581,-18.311 v1@4.894,-18.288 ; v1@4.581,-18.311 v1@4.749,-18.046 ; v1@4.581,-18.311 v1@4.85,-18.15 ; v1@4.581,-18.311 v1@4.894,-18.288 ; v1@4.581,-18.311 v1@4.749,-18.046 ; v1@4.581,-18.311 v1@4.85,-18.15 ; U2.23@5.54,-10.357 5.54,-10.16 ; U2.23@5.54,-10.357 5.775,-9.925 5.54,-10.16 ; U2.23@5.54,-10.357 5.54,-10.16 ; 6.204,-10.194 6.34,-10.33 U2.25@6.34,-10.927 6.34,-11.61 ; 6.204,-10.194 6.634,-10.194 ; 6.243,-11.707 6.164,-11.786 U2.25@6.34,-11.497 ; 6.243,-11.707 6.34,-11.61 ; 6.243,-11.707 6.673,-11.707 6.74,-11.64 ; 6.34,-11.61 U2.25@6.34,-11.497 ; 6.34,-11.61 U2.25@6.34,-11.497 ; 6.634,-10.194 6.74,-10.3 U2.26@6.74,-10.927 6.74,-11.64 ; 6.74,-11.64 6.74,-11.497 6.74,-11.64
  BottomLayer w0.3: C21.2@15.845,-14.154 v1@16.6,-15.635 ; C21.2@16.18,-14.027 v1@16.6,-15.635 ; C21.2@16.18,-13.9 16.6,-14.32 v1@16.6,-17.95 ; C21.2@16.534,-13.974 v1@16.6,-15.635 ; v1@16.6,-17.95 v1(16.05,-18.7) 16.05,-18.5 v1@16.6,-17.95
  BottomLayer w0.4: 2.442,-7.7 C3.2@2.442,-7.2 2.442,-6.55 ; U4.1@5.659,-7.107 5.659,-4.205 ; v1(9.686,-8.022) 10.072,-8.022 10.959,-8.909 ; 12.114,-9.212 12.54,-9.637 C1.2@12.6,-9.637 13.21,-9.637 ; 12.596,-4.407 14.028,-4.407 14.335,-4.1 ; C38.2@14.958,-9.15 C26.2@14.958,-8.15 14.958,-7.601
  BottomLayer w0.5: 3.899,-4.425 3.899,-4.475 L5.2@4.5,-5.076 C9.2@4.5,-6.134 ; 8.352,-8.15 9.276,-7.226 ; 12.604,-4.415 U5.2@13.55,-4.415
  BottomLayer w0.6: 4.744,-6.192 U4.1@5.659,-7.107 ; v1@5.714,-26.006 DZ1.2@6.775,-26.006 DZ3.2@8.275,-26.006 DZ2.2@9.775,-26.006 10.409,-26.006 ; Y1.3@9.443,-21.458 R10.2@10.8,-21.458 11.498,-21.458 U1.4@12.14,-22.1 12.232,-22.192 12.232,-23.171
  other v1: 1.75,-28 2.5,-28 3.25,-28 4.05,-28 5.14,-28 10.521,-27.95 11.492,-27.953 12.596,-27.953 13.685,-27.95 14.75,-27.966 6.34,-27.9 7.166,-27.9 7.95,-27.9 8.8,-27.9 9.55,-27.9 1.802,-27.067 2.95,-26.94 5.774,-26.95 8.8,-26.9 13.54,-26.712 10.602,-26.691 14.75,-26.648 1.779,-26.05 5.679,-26.015 7.534,-25.99 12.47,-25.959 3.926,-25.893 14.75,-25.3 1.802,-25.15 2.935,-25.15 13.929,-24.688 12.47,-24.509 14.045,-23.15 1.64,-23.1 0.471,-22.947 4.5,-22.536 5.81,-22.534 10.11,-22.5 7.313,-22.208 0.539,-21.919 5.775,-21.835 4.5,-21.809 10.122,-21.4 7.463,-21.193 4.479,-21.145 11.55,-21.115 6.59,-21.088 5.75,-21.042 16.4,-20.874 0.539,-20.768 0.565,-19.667 10.11,-19.215 11.821,-18.824 6.234,-18.785 9.25,-18.5 4.753,-18.2 6.9,-17.918 16.5,-17.898 5.5,-17.6 7.313,-17.034 9.15,-17.05 6.1,-16.85 6.85,-16.15 9.4,-15.895 5.3,-15.697 16.45,-15.583 8.298,-15.263 5.14,-14.543 16.487,-14.42 15.359,-13.924 7.45,-13.726 0.471,-13.4 6.422,-13.345 16.5,-13.292 3.25,-12.212 15.358,-11.919 9.728,-11.827 11.343,-11.675 16.5,-11.578 13.475,-11.46 2.461,-11.187 0.513,-11.1 11.732,-10.873 9.818,-10.775 12.909,-10.26 16.52,-10.093 0.51,-10.077 11.832,-9.913 7.631,-9.698 13.154,-9.316 11.387,-9.212 9.673,-9.087 5.059,-8.675 16.511,-8.65 6.93,-8.217 7.64,-8.11 5.25,-7.8 16.509,-7.418 9.542,-6.915 15.04,-6.89 12.538,-6.743 0.516,-6.05 16.5,-5.732 9.673,-5.329 3.041,-4.897 0.556,-4.578 16.43,-4.524 3.531,-4.35 2.92,-4 14.633,-3.732 15.328,-3.55 3.562,-3.5 2.9,-3.182 1.4,-2.78 0.511,-2.492 15.9,-2.451 12.25,-2.087 8.686,-2.049 10.054,-2.038 16.487,-1.657 0.5,-1.625 12.236,-1.224 16.476,-0.542 3.877,-0.517 5.164,-0.531 8.435,-0.52 0.539,-0.506 7.279,-0.5 10.103,-0.501 12.212,-0.497 15.238,-0.48
  other v2: 5.091,-5.542
IOA0: U2.43
IOA1: U2.44
IOA2: 
IOA3: U2.46
IOA4: 
IOA5: 
IOA6: 
IOA7: 
IOC12: R4.2 U2.14 | length 12
  TopLayer w0.15: v1@0.925,-11.641 R4.2@1.046,-10.996 ; v1@0.927,-11.624 R4.2@1.1,-11.058 ; v1@0.935,-11.591 R4.2@1.237,-11.008 ; v1@0.959,-11.546 R4.2@1.417,-11.075 ; v1@1.263,-11.713 R4.2@1.417,-11.075 ; v1@1.271,-11.612 R4.2@1.046,-10.996 ; v1@1.273,-11.624 R4.2@1.1,-11.058 ; v1@1.274,-11.663 R4.2@1.237,-11.008 ; R4.2@1.046,-10.996 v1(1.1,-11.65) ; v1(1.1,-11.65) R4.2@1.1,-11.058 ; v1(1.1,-11.65) R4.2@1.417,-11.075 ; v1(1.1,-11.65) R4.2@1.237,-11.008
  BottomLayer w0.15: 0.932,-13.187 U2.14@1.07,-13.227 ; v1@0.94,-11.579 0.783,-12.15 ; v1@1.232,-11.765 0.783,-12.15 ; U2.14@1.64,-13.227 1.081,-13.227 cw(c1.081,-12.929) 0.871,-13.14 cw(c1.161,-12.849) 0.75,-12.849 0.75,-12.4 cw(c1.716,-12.4) 1.033,-11.717 v1(1.1,-11.65) 0.783,-12.15
IOC13: L3.2 U2.15 | length 8.1
  BottomLayer w0.15: U2.15@1.64,-12.827 2.138,-12.827 ccw(c2.138,-12.435) 2.415,-12.712 2.461,-12.667 ccw(c2.294,-12.5) 2.53,-12.5 2.53,-12.427 ccw(c2.193,-12.427) 2.431,-12.189 2.284,-12.042 cw(c3.14,-11.187) 1.93,-11.187 1.93,-6.178 L3.2@2.25,-5.858 ; U2.15@2.21,-12.827 2.334,-12.775
IOC14: L4.2 U2.16 | length 6.6
  BottomLayer w0.15: L4.2@1.285,-5.946 1.64,-6.301 U2.16@1.64,-12.427
IOC15: R5.2 U2.18 | length 7.8
  TopLayer w0.2: R5.2@1.157,-9.187 1.797,-9.605 ; R5.2@1.25,-9.058 1.797,-9.605 ; R5.2@1.263,-9.058 1.797,-9.605 ; R5.2@1.394,-8.955 1.797,-9.605 ; v1@3.337,-10.049 2.509,-9.9 ; v1@3.337,-9.751 2.509,-9.9 ; v1(3.35,-9.9) 2.509,-9.9 ; 1.797,-9.605 ccw(c2.509,-8.893) 2.509,-9.9
  BottomLayer w0.21: v1(3.35,-9.9) 3.54,-10.09 ; U2.18@3.54,-10.927 3.54,-10.09 ; U2.18@3.54,-10.357 3.54,-10.09
IOD10: 
IOD13: 
IOE2: 
IOE3: 
IOE4: 
IOE5: 
IOE6: 
IOE7: 
ISP: U2.6
LINE0: U2.55
MCN: C23.1 JP1.2 U2.34 | length 17.2
  TopLayer w0.15: JP1.2@5.582,-4.641 5.746,-4.925 ; JP1.2@5.7,-4.6 5.746,-4.925 ; JP1.2@5.7,-3.8 5.7,-4.755 ccw(c6.041,-4.755) 5.8,-4.996 cw(c5.563,-5.233) 5.898,-5.233 5.898,-6.251 cw(c5.044,-6.251) C23.1@5.648,-6.854 cw(c5.044,-7.458) 5.898,-7.458 5.898,-12.042 ccw(c6.758,-12.042) v1(6.15,-12.65) 5.927,-12.264 ; JP1.2@5.825,-4.606 5.746,-4.925 ; v1@5.984,-12.706 5.927,-12.264 ; v1@6.281,-12.534 5.927,-12.264
  BottomLayer w0.15: v1@6.108,-12.82 6.421,-12.806 v1@6.276,-12.529 ; v1(6.15,-12.65) ccw(c6.577,-12.223) 6.577,-12.827 ; 6.498,-12.827 6.577,-12.827 ; 9.515,-12.827 U2.34@10.07,-12.827 ; U2.34@10.64,-12.827 6.577,-12.827
MCP: C31.2 JP1.3 U2.33 | length 16.3
  TopLayer w0.15: JP1.3@6.375,-4.606 6.453,-4.926 ; JP1.3@6.5,-4.6 6.453,-4.926 ; JP1.3@6.5,-3.8 6.5,-4.752 cw(c6.152,-4.752) 6.398,-4.998 ccw(c6.63,-5.23) 6.302,-5.23 6.302,-6.15 ccw(c7.292,-6.15) C31.2@6.592,-6.85 ccw(c7.292,-7.55) 6.302,-7.55 6.302,-11.374 ccw(c7.582,-11.374) v1(6.677,-12.28) 6.346,-11.706 ; v1@6.515,-12.346 6.346,-11.706 ; JP1.3@6.618,-4.641 6.453,-4.926 ; v1@6.816,-12.173 6.346,-11.706
  BottomLayer w0.15: v1(6.677,-12.28) ccw(c7.033,-11.924) 7.033,-12.427 U2.33@10.64,-12.427 ; 9.515,-12.427 U2.33@10.07,-12.427
MDN: JP1.6 U2.36 | length 12.9
  TopLayer w0.15: v1(8.55,-13.7) ccw(c8.183,-13.333) 8.702,-13.333 8.702,-5.233 cw(c9.037,-5.233) 8.8,-4.996 ccw(c8.559,-4.755) 8.9,-4.755 JP1.6@8.9,-4.7 ; JP1.6@8.775,-4.606 8.854,-4.925 ; JP1.6@8.9,-4.6 8.854,-4.925 ; JP1.6@9.018,-4.641 8.854,-4.925
  BottomLayer w0.15: v1@8.4,-13.75 8.523,-13.627 U2.36@10.64,-13.627 ; 9.515,-13.627 U2.36@10.07,-13.627